# Altium PCB main.PcbDoc (part 3 of 3)
Units mm, origin at the board's own origin, x right, y up, seen from the top; angles counter-clockwise.
Board outline 126 x 86 mm, 2 copper layers (Top Layer, Bottom Layer); 214 components, 256 nets, 850 pads, 614 vias.
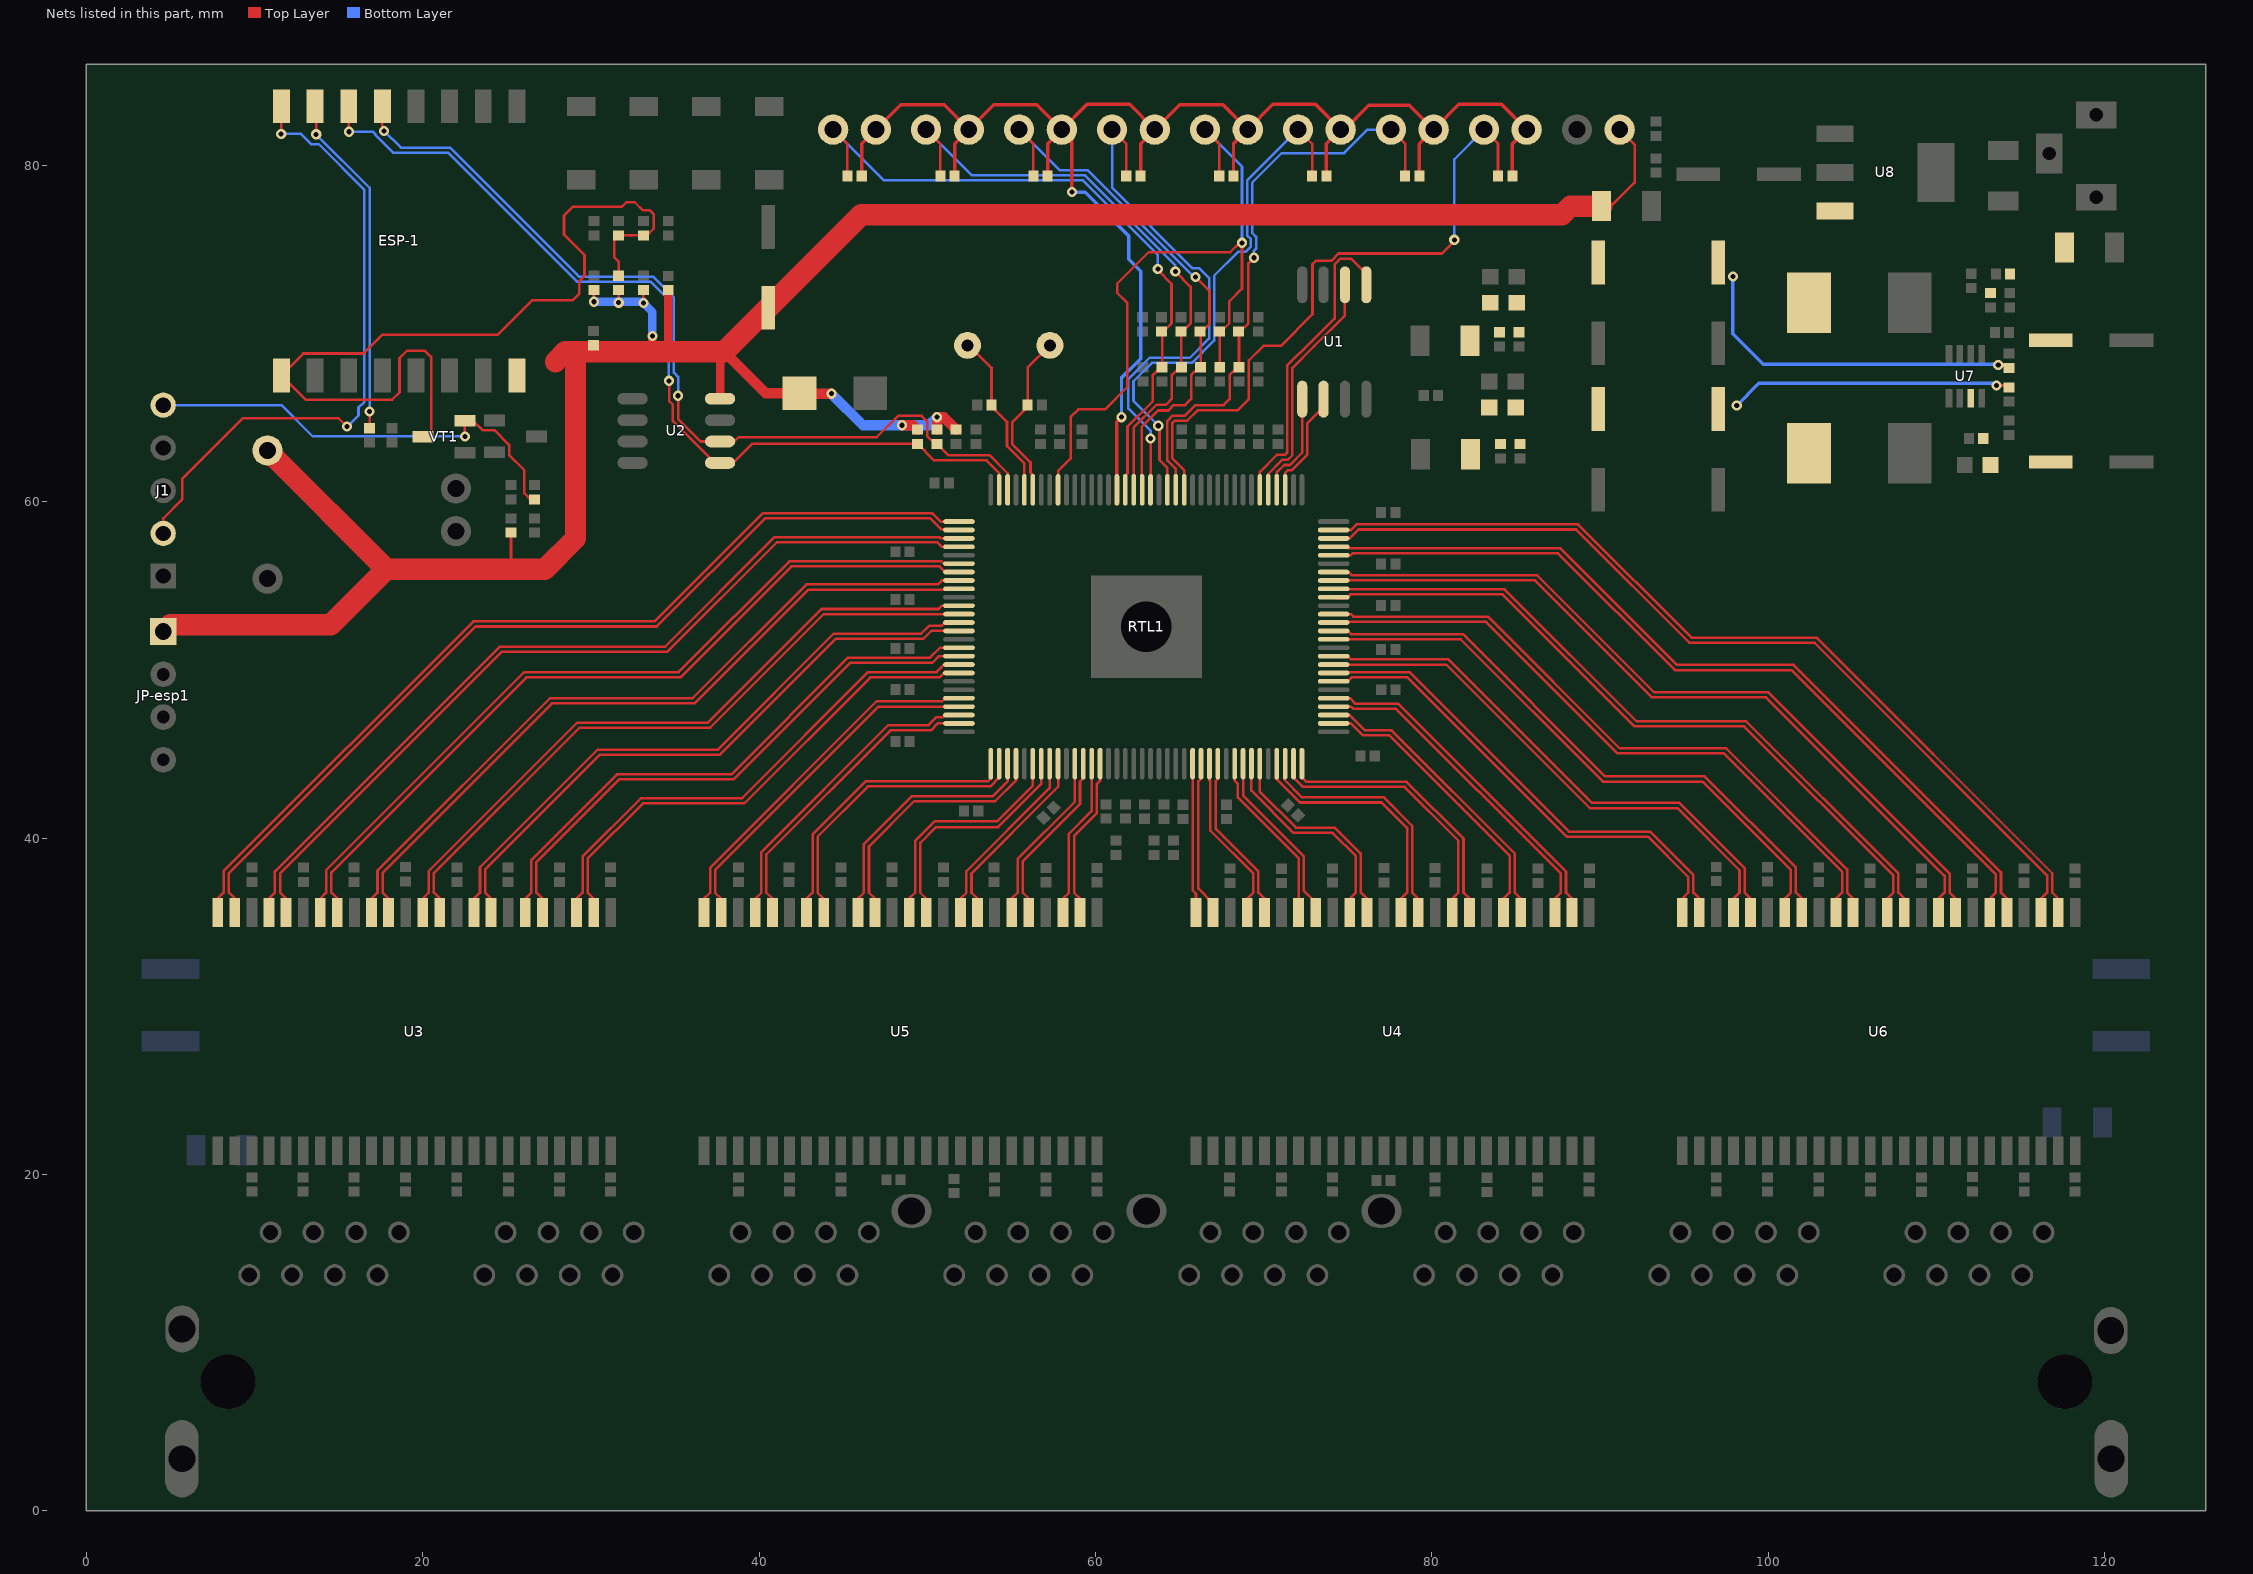
[diagram p3: the nets of this part, all layers, seen from the top]

## Via types
v1: diameter 0.61, hole 0.305, Top Layer to Bottom Layer, 609 vias
v2: diameter 0.711, hole 0.305, Top Layer to Bottom Layer, 5 vias

## Nets (pads, with @x,y where several pads share a name; then routed paths per layer and width w, separated by ;. In a path a pad name is that pad's centre, name@x,y a point inside that pad or via, vN(x,y) a via of type N, cw(c..) or ccw(c..) an arc to the next point about the centre after c; other vN are vias at no path point) (continued)
NRST: C6.1 ESP-1.1 R31.2 R40.2 VT1.3 | length 53.8
  Top Layer w0.152: VT1.3@20.01,63.856 20.295,63.856 20.498,64.059 20.498,68.605 20.142,68.961 19.05,68.961 18.618,68.529 18.618,66.497 18.186,66.065 13.035,66.065 ESP-1.1@11.6,67.5 12.909,68.809 16.478,68.809 17.595,69.926 24.463,69.926 26.521,71.984 28.931,71.984 29.317,72.37 29.317,73.129 29.616,73.428 29.616,74.659 28.397,75.878 28.397,77.012 28.906,77.521 31.826,77.521 32.106,77.8 32.606,77.8 33.089,77.318 33.503,77.318 33.731,77.089 33.731,76.225 33.332,75.826 C6.1@33.122,75.826 32.385,75.826 ; R31.2@31.648,73.431 31.648,74.27 31.394,74.524 31.394,75.572 R40.2@31.648,75.826 32.112,75.826 32.385,75.826 ; 32.385,75.819 32.385,75.826
P0A_N: RTL1.104 U3.23 | length 54.9
  Top Layer w0.152: U3.23@8.826,35.47 U3.23@8.826,35.576 8.826,36.396 8.471,36.752 8.471,37.909 23.139,52.578 33.909,52.578 40.335,59.004 50.175,59.004 50.809,58.37 RTL1.104@51.756,58.37
P0A_P: RTL1.103 U3.24 | length 55.4
  Top Layer w0.152: U3.24@7.81,35.47 U3.24@7.81,35.576 7.81,36.396 8.166,36.752 8.166,38.035 23.013,52.883 33.783,52.883 40.209,59.309 50.301,59.309 50.795,58.815 RTL1.103@51.88,58.815
P0B_N: RTL1.106 U3.20 | length 51.2
  Top Layer w0.152: U3.20@11.874,35.47 U3.20@11.874,35.576 11.874,36.396 11.519,36.752 11.519,37.884 24.714,51.079 34.544,51.079 41.046,57.582 50.597,57.582 50.864,57.315 RTL1.106@51.88,57.315
P0B_P: RTL1.105 U3.21 | length 51.6
  Top Layer w0.152: U3.21@10.858,35.47 U3.21@10.858,35.576 10.858,36.396 11.214,36.752 11.214,38.01 24.588,51.384 34.418,51.384 40.92,57.887 50.724,57.887 50.795,57.815 RTL1.105@51.88,57.815
P0C_N: RTL1.109 U3.17 | length 47.6
  Top Layer w0.152: U3.17@14.922,35.47 U3.17@14.922,35.576 14.922,36.396 14.567,36.752 14.567,37.96 26.162,49.555 35.331,49.555 41.925,56.149 50.726,56.149 50.928,55.947 50.929,55.947 51.06,55.815 RTL1.109@51.88,55.815
P0C_P: RTL1.108 U3.18 | length 48
  Top Layer w0.152: U3.18@13.906,35.47 U3.18@13.906,35.576 13.906,36.396 14.262,36.752 14.262,38.086 26.036,49.86 35.205,49.86 41.798,56.453 50.853,56.453 50.991,56.315 RTL1.108@51.88,56.315
P0D_N: RTL1.111 U3.14 | length 43.9
  Top Layer w0.152: U3.14@17.97,35.47 U3.14@17.97,35.576 17.97,36.396 17.615,36.752 17.615,37.935 27.686,48.006 36.17,48.006 42.937,54.774 51.839,54.774 RTL1.111@51.88,54.815
P0D_P: RTL1.110 U3.15 | length 44.5
  Top Layer w0.152: U3.15@16.954,35.47 U3.15@16.954,35.576 16.954,36.396 17.31,36.752 17.31,38.061 27.56,48.311 36.043,48.311 42.811,55.078 50.627,55.078 50.864,55.315 RTL1.110@51.88,55.315
P1A_N: RTL1.114 U3.11 | length 40.2
  Top Layer w0.152: U3.11@21.018,35.47 U3.11@21.018,35.576 21.018,36.396 20.663,36.752 20.663,37.909 29.312,46.558 37.084,46.558 43.841,53.315 RTL1.114@51.88,53.315
P1A_P: RTL1.113 U3.12 | length 40.8
  Top Layer w0.152: U3.12@20.002,35.47 U3.12@20.002,35.576 20.002,36.396 20.358,36.752 20.358,38.035 29.185,46.863 36.958,46.863 43.715,53.62 50.669,53.62 50.864,53.815 RTL1.113@51.88,53.815
P1B_N: RTL1.116 U3.8 | length 36.9
  Top Layer w0.152: U3.8@24.066,35.47 U3.8@24.066,35.576 24.066,36.396 23.711,36.752 23.711,38.138 30.531,44.958 37.668,44.958 44.552,51.841 49.758,51.841 50.232,52.315 RTL1.116@51.88,52.315
P1B_P: RTL1.115 U3.9 | length 37.4
  Top Layer w0.152: U3.9@23.05,35.47 U3.9@23.05,35.576 23.05,36.396 23.406,36.752 23.406,38.264 30.405,45.263 37.542,45.263 44.425,52.146 49.632,52.146 50.105,52.62 50.842,52.62 51.037,52.815 RTL1.115@51.88,52.815
P1C_N: RTL1.119 U3.5 | length 33.4
  Top Layer w0.152: U3.5@27.114,35.47 U3.5@27.114,35.576 27.114,36.396 26.759,36.752 26.759,38.57 31.674,43.485 38.481,43.485 45.415,50.419 50.291,50.419 50.687,50.815 RTL1.119@51.88,50.815
P1C_P: RTL1.118 U3.6 | length 34
  Top Layer w0.152: U3.6@26.098,35.47 U3.6@26.098,35.576 26.098,36.396 26.454,36.752 26.454,38.696 31.548,43.79 38.355,43.79 45.289,50.724 50.165,50.724 50.756,51.315 RTL1.118@51.88,51.315
P1D_N: RTL1.121 U3.2 | length 30.1
  Top Layer w0.152: U3.2@30.162,35.47 U3.2@30.162,35.576 30.162,36.396 29.807,36.752 29.807,38.773 33.096,42.062 39.116,42.062 46.609,49.555 50.724,49.555 50.984,49.815 RTL1.121@51.88,49.815
P1D_P: RTL1.120 U3.3 | length 30.7
  Top Layer w0.152: U3.3@29.146,35.47 U3.3@29.146,35.576 29.146,36.396 29.502,36.752 29.502,38.899 32.97,42.367 38.99,42.367 46.483,49.86 50.546,49.86 51.001,50.315 RTL1.120@51.88,50.315
P2A_N: RTL1.125 U5.23 | length 21.3
  Top Layer w0.152: U5.23@37.742,35.468 U5.23@37.742,35.576 37.742,36.394 37.387,36.749 37.387,38.098 47.104,47.815 RTL1.125@51.88,47.815
P2A_P: RTL1.124 U5.24 | length 21.9
  Top Layer w0.152: U5.24@36.726,35.468 U5.24@36.726,35.576 36.726,36.394 37.082,36.749 37.082,38.224 46.991,48.133 50.877,48.133 51.059,48.315 RTL1.124@51.88,48.315
P2B_N: RTL1.127 U5.20 | length 18.4
  Top Layer w0.152: U5.20@40.79,35.468 U5.20@40.79,35.576 40.79,36.394 40.435,36.749 40.435,39.038 47.803,46.406 50.207,46.406 50.616,46.815 RTL1.127@51.88,46.815
P2B_P: RTL1.126 U5.21 | length 19
  Top Layer w0.152: U5.21@39.774,35.468 U5.21@39.774,35.576 39.774,36.394 40.13,36.749 40.13,39.164 47.677,46.711 50.081,46.711 50.554,47.184 50.929,47.184 51.06,47.315 RTL1.126@51.88,47.315
P2C_N: RTL1.2 U5.17 | length 17.8
  Top Layer w0.152: U5.17@43.838,35.468 U5.17@43.838,35.576 43.838,36.394 43.485,36.747 43.485,40.09 46.473,43.078 53.746,43.078 54.27,43.602 RTL1.2@54.27,44.425
P2C_P: RTL1.1 U5.18 | length 17.8
  Top Layer w0.152: U5.18@42.822,35.468 U5.18@42.822,35.576 42.822,36.394 43.18,36.752 43.18,40.216 46.347,43.383 53.62,43.383 53.77,43.533 RTL1.1@53.77,44.425
P2D_N: RTL1.4 U5.14 | length 15.5
  Top Layer w0.152: U5.14@46.886,35.468 U5.14@46.886,35.576 46.886,36.394 46.531,36.749 46.531,39.511 49.209,42.189 54.025,42.189 55.27,43.435 RTL1.4@55.27,44.425
P2D_P: RTL1.3 U5.15 | length 15.5
  Top Layer w0.152: U5.15@45.87,35.468 U5.15@45.87,35.576 45.87,36.394 46.226,36.749 46.226,39.637 49.083,42.494 53.899,42.494 54.77,43.366 RTL1.3@54.77,44.425
P3A_N: RTL1.7 U5.11 | length 14.2
  Top Layer w0.152: U5.11@49.934,35.468 U5.11@49.934,35.576 49.934,36.394 49.579,36.749 49.579,39.709 50.519,40.649 54.213,40.649 56.77,43.207 RTL1.7@56.77,44.425
P3A_P: RTL1.6 U5.12 | length 14.2
  Top Layer w0.152: U5.12@48.918,35.468 U5.12@48.918,35.576 48.918,36.394 49.274,36.749 49.274,39.835 50.435,40.996 54.128,40.996 56.27,43.138 RTL1.6@56.27,44.425
P3B_N: RTL1.9 U5.8 | length 11.2
  Top Layer w0.152: U5.8@52.982,35.468 U5.8@52.982,35.576 52.982,36.394 52.627,36.749 52.627,37.901 57.575,42.849 57.575,42.855 57.77,43.05 RTL1.9@57.77,44.425
P3B_P: RTL1.8 U5.9 | length 11.2
  Top Layer w0.152: U5.9@51.966,35.468 U5.9@51.966,35.576 51.966,36.394 52.322,36.749 52.322,38.027 57.27,42.975 RTL1.8@57.27,44.425
P3C_N: RTL1.12 U5.5 | length 10.6
  Top Layer w0.152: U5.5@56.03,35.468 U5.5@56.03,35.576 56.03,36.394 55.675,36.749 55.675,38.631 57.912,40.869 ; 57.912,40.869 59.075,42.032 59.075,43.352 59.27,43.548 RTL1.12@59.27,44.425
P3C_P: RTL1.11 U5.6 | length 10.5
  Top Layer w0.152: U5.6@55.014,35.468 U5.6@55.014,35.576 55.014,36.394 55.37,36.749 55.37,38.758 58.77,42.159 RTL1.11@58.77,44.425
P3D_N: RTL1.14 U5.2 | length 9.7
  Top Layer w0.152: U5.2@59.078,35.468 U5.2@59.078,35.576 59.078,36.394 58.723,36.749 58.723,40.13 60.075,41.482 60.075,43.214 60.27,43.409 RTL1.14@60.27,44.425
P3D_P: RTL1.13 U5.3 | length 9.7
  Top Layer w0.152: U5.3@58.062,35.468 U5.3@58.062,35.576 58.062,36.394 58.418,36.749 58.418,40.256 59.77,41.608 RTL1.13@59.77,44.425
P4A_N: RTL1.26 U4.23 | length 8.6
  Top Layer w0.152: RTL1.26@66.27,44.425 66.27,44.405 RTL1.26@66.285,44.39 ; RTL1.26@66.31,43.565 66.11,43.365 66.11,36.996 66.99,36.116 U4.23@66.99,35.576 U4.23@66.99,35.47
P4A_P: RTL1.25 U4.24 | length 9
  Top Layer w0.152: RTL1.25@65.77,44.425 65.77,36.897 65.974,36.693 U4.24@65.974,35.576 U4.24@65.974,35.47
P4B_N: RTL1.28 U4.20 | length 10.2
  Top Layer w0.152: RTL1.28@67.27,44.425 67.27,43.521 67.135,43.386 67.135,40.56 69.683,38.013 69.683,36.752 70.038,36.396 U4.20@70.038,35.576 U4.20@70.038,35.47
P4B_P: RTL1.27 U4.21 | length 10.2
  Top Layer w0.152: RTL1.27@66.77,44.425 66.77,43.44 66.83,43.38 66.83,40.434 69.378,37.886 69.378,36.752 69.022,36.396 U4.21@69.022,35.576 U4.21@69.022,35.47
P4C_N: RTL1.31 U4.17 | length 10.7
  Top Layer w0.152: RTL1.31@68.77,44.425 68.77,42.532 72.375,38.927 72.375,36.896 73.086,36.185 U4.17@73.086,35.576 U4.17@73.086,35.47
P4C_P: RTL1.30 U4.18 | length 10.5
  Top Layer w0.152: RTL1.30@68.27,44.425 68.27,43.409 68.465,43.214 68.465,42.406 72.07,38.801 U4.18@72.07,35.576 U4.18@72.07,35.47
P4D_N: RTL1.33 U4.14 | length 12.9
  Top Layer w0.152: RTL1.33@69.77,44.425 69.77,42.751 71.907,40.615 74.218,40.615 75.779,39.054 75.779,36.752 76.134,36.396 U4.14@76.134,35.576 U4.14@76.134,35.47
P4D_P: RTL1.32 U4.15 | length 13
  Top Layer w0.152: RTL1.32@69.27,44.425 69.27,42.82 71.78,40.31 74.092,40.31 75.474,38.928 75.474,36.752 75.118,36.396 U4.15@75.118,35.576 U4.15@75.118,35.47
P5A_N: RTL1.36 U4.11 | length 15.1
  Top Layer w0.152: RTL1.36@71.27,44.425 71.27,43.875 71.21,43.815 71.21,43.496 72.286,42.42 77.138,42.42 78.827,40.731 78.827,36.752 79.182,36.396 U4.11@79.182,35.576 U4.11@79.182,35.47
P5A_P: RTL1.35 U4.12 | length 15.2
  Top Layer w0.152: RTL1.35@70.77,44.425 70.77,43.505 72.16,42.115 77.012,42.115 78.522,40.605 78.522,36.752 78.166,36.396 U4.12@78.166,35.576 U4.12@78.166,35.47
P5B_N: RTL1.38 U4.8 | length 16.6
  Top Layer w0.152: RTL1.38@72.27,44.425 72.27,43.63 72.555,43.345 78.496,43.345 81.875,39.966 81.875,36.752 82.23,36.396 U4.8@82.23,35.576 U4.8@82.23,35.47
P5B_P: RTL1.37 U4.9 | length 16.7
  Top Layer w0.152: RTL1.37@71.77,44.425 71.77,43.605 71.902,43.474 71.902,43.473 72.118,43.257 72.119,43.257 72.335,43.04 78.37,43.04 81.57,39.84 81.57,36.752 81.214,36.396 U4.9@81.214,35.576 U4.9@81.214,35.47
P5C_N: RTL1.41 U4.5 | length 17.9
  Top Layer w0.152: RTL1.41@74.16,47.315 75.107,47.315 76.017,46.406 77.596,46.406 84.923,39.079 84.923,36.752 85.278,36.396 U4.5@85.278,35.576 U4.5@85.278,35.47
P5C_P: RTL1.40 U4.6 | length 17.3
  Top Layer w0.152: RTL1.40@74.16,46.815 75.176,46.815 75.891,46.101 77.47,46.101 84.618,38.953 84.618,36.752 84.262,36.396 U4.6@84.262,35.576 U4.6@84.262,35.47
P5D_N: RTL1.43 U4.2 | length 20.8
  Top Layer w0.152: RTL1.43@74.16,48.315 75.128,48.315 75.463,47.981 78.003,47.981 87.971,38.013 87.971,36.752 88.326,36.396 U4.2@88.326,35.576 U4.2@88.326,35.47
P5D_P: RTL1.42 U4.3 | length 20.2
  Top Layer w0.152: RTL1.42@74.16,47.815 75.197,47.815 75.336,47.676 77.876,47.676 87.666,37.886 87.666,36.752 87.31,36.396 U4.3@87.31,35.576 U4.3@87.31,35.47
P6A_N: RTL1.46 U6.23 | length 28.9
  Top Layer w0.152: RTL1.46@74.16,49.815 74.229,49.815 74.274,49.86 78.663,49.86 88.137,40.386 92.963,40.386 95.544,37.806 95.544,36.752 95.899,36.396 U6.23@95.899,35.47
P6A_P: RTL1.45 U6.24 | length 28.5
  Top Layer w0.152: RTL1.45@74.16,49.315 74.981,49.315 75.222,49.555 78.537,49.555 88.011,40.081 92.837,40.081 95.239,37.679 95.239,36.752 94.883,36.396 U6.24@94.883,35.47
P6B_N: RTL1.48 U6.20 | length 32.5
  Top Layer w0.152: RTL1.48@74.16,50.815 74.985,50.815 75.18,50.62 80.977,50.62 89.509,42.088 94.716,42.088 98.592,38.212 98.592,36.752 98.947,36.396 U6.20@98.947,35.47
P6B_P: RTL1.47 U6.21 | length 32
  Top Layer w0.152: RTL1.47@74.16,50.315 80.85,50.315 89.383,41.783 94.59,41.783 98.287,38.086 98.287,36.752 97.931,36.396 U6.21@97.931,35.47
P6C_N: RTL1.51 U6.17 | length 36.2
  Top Layer w0.152: RTL1.51@74.16,52.315 74.981,52.315 75.176,52.121 81.051,52.121 ; 81.052,52.12 81.839,52.12 90.296,43.663 96.214,43.663 101.64,38.237 101.64,36.752 101.995,36.396 U6.17@101.995,35.47
P6C_P: RTL1.50 U6.18 | length 35.6
  Top Layer w0.152: RTL1.50@74.16,51.815 81.713,51.815 90.17,43.358 96.088,43.358 101.335,38.111 101.335,36.752 100.979,36.396 U6.18@100.979,35.47
P6D_N: RTL1.53 U6.14 | length 39.6
  Top Layer w0.152: RTL1.53@74.16,53.315 75.176,53.315 75.329,53.162 83.337,53.162 91.16,45.339 97.484,45.339 104.688,38.136 104.688,36.752 105.043,36.396 U6.14@105.043,35.47
P6D_P: RTL1.52 U6.15 | length 39.1
  Top Layer w0.152: RTL1.52@74.16,52.815 74.194,52.849 83.219,52.849 91.034,45.034 97.358,45.034 104.383,38.01 104.383,36.752 104.027,36.396 U6.15@104.027,35.47
P7A_N: RTL1.56 U6.11 | length 43.2
  Top Layer w0.152: RTL1.56@74.16,54.815 74.188,54.788 84.327,54.788 92.176,46.939 98.687,46.939 107.736,37.89 107.736,36.752 108.091,36.396 U6.11@108.091,35.47
P7A_P: RTL1.55 U6.12 | length 42.8
  Top Layer w0.152: RTL1.55@74.16,54.315 74.229,54.315 74.284,54.26 74.927,54.26 75.149,54.483 84.201,54.483 92.05,46.634 98.56,46.634 107.431,37.764 107.431,36.752 107.075,36.396 U6.12@107.075,35.47
P7B_N: RTL1.58 U6.8 | length 46.6
  Top Layer w0.152: RTL1.58@74.16,55.815 75.035,55.815 75.224,55.626 86.258,55.626 ; 86.258,55.625 93.217,48.666 99.999,48.666 110.784,37.882 110.784,36.752 111.139,36.396 U6.8@111.139,35.47
P7B_P: RTL1.57 U6.9 | length 46
  Top Layer w0.152: RTL1.57@74.16,55.315 86.137,55.315 93.091,48.362 99.873,48.362 110.479,37.756 110.479,36.752 110.123,36.396 U6.9@110.123,35.47
P7C_N: RTL1.61 U6.5 | length 50.4
  Top Layer w0.152: RTL1.61@74.16,57.315 75.01,57.315 75.01,57.232 87.624,57.232 94.563,50.292 101.498,50.292 113.832,37.959 113.832,36.752 114.187,36.396 U6.5@114.187,35.47
P7C_P: RTL1.60 U6.6 | length 49.8
  Top Layer w0.152: RTL1.60@74.16,56.815 75.176,56.815 75.288,56.927 87.497,56.927 94.437,49.987 101.372,49.987 113.527,37.833 113.527,36.752 113.171,36.396 U6.6@113.171,35.47
P7D_N: RTL1.63 U6.2 | length 54
  Top Layer w0.152: RTL1.63@74.16,58.315 75.176,58.315 75.51,58.649 88.696,58.649 95.427,51.918 102.869,51.918 116.88,37.907 116.88,36.752 117.235,36.396 U6.2@117.235,35.47
P7D_P: RTL1.62 U6.3 | length 53.6
  Top Layer w0.152: RTL1.62@74.16,57.815 75.11,57.815 75.639,58.344 88.57,58.344 95.301,51.613 102.743,51.613 116.575,37.781 116.575,36.752 116.219,36.396 U6.3@116.219,35.47
RTS: J1.5 R43.2 VT1.2 | length 26.9
  Top Layer w0.152: v1(22.51,63.881) VT1.2@22.51,64.806 23.002,64.806 23.555,64.252 24.254,64.252 25.131,63.376 25.131,62.779 26.035,61.874 26.035,60.503 26.409,60.129 R43.2@26.645,60.129
  Bottom Layer w0.152: J1.5@4.572,65.735 11.608,65.735 13.462,63.881 v1(22.51,63.881)
RXD: ESP-1.15 R41.2 | length 20.6
  Top Layer w0.152: ESP-1.15@13.6,83.5 13.843,83.257 13.665,83.079 v1(13.665,81.839) ; R41.2@16.84,64.364 v1(16.84,65.354)
  Bottom Layer w0.152: v1(13.665,81.839) 16.84,78.664 v1(16.84,65.354)
SCK/MDC: ESP-1.13 R29.1 RTL1.100 U2.6 | length 53.9
  Top Layer w0.152: ESP-1.13@17.6,83.5 17.6,82.146 v1(17.704,82.042) ; v1(35.179,66.294) 35.179,64.922 36.525,63.576 U2.6@37.677,63.576 37.776,63.576 37.928,63.424 38.379,63.424 38.786,63.83 46.99,63.83 48.26,65.1 49.657,65.1 49.987,64.77 49.987,63.917 50.473,63.431 R29.1@50.571,63.431 51.239,62.763 53.696,62.763 54.77,61.69 RTL1.100@54.77,60.705
  Bottom Layer w0.152: v1(17.704,82.042) 18.694,81.051 21.615,81.051 29.285,73.381 33.68,73.381 34.925,72.135 34.925,67.666 35.179,67.412 v1(35.179,66.294)
SDA/MDIO: ESP-1.14 R30.1 RTL1.101 U2.5 | length 54.6
  Top Layer w0.152: ESP-1.14@15.6,83.5 15.6,82.012 v1(15.621,81.991) ; v1(34.646,67.183) 34.646,65.989 34.874,65.761 34.874,64.796 34.925,64.745 ; 34.925,64.745 37.363,62.306 U2.5@37.677,62.306 38.456,62.306 39.58,63.431 R30.1@49.403,63.431 ; R30.1@49.403,63.449 50.394,62.459 53.518,62.459 54.27,61.706 RTL1.101@54.27,60.705
  Bottom Layer w0.152: v1(15.621,81.991) 17.043,81.991 17.17,81.864 17.17,81.821 18.245,80.747 21.488,80.747 29.159,73.076 33.553,73.076 34.62,72.009 34.62,67.208 v1(34.646,67.183)
SLED_G1B: D1.K D2.K D3.K D4.K D5.K D6.K D7.K D8.K R3.2 R4.2 R5.2 R6.2 R7.2 R8.2 R9.2 R10.2 RTL1.87 | length 96.9
  Top Layer w0.203: R3.2@46.101,79.35 46.101,81.28 D1.K@46.939,82.118 48.412,83.591 50.994,83.591 D2.K@52.467,82.118 ; R4.2@51.626,79.35 51.626,81.278 D2.K@52.467,82.118 ; R5.2@57.152,79.35 57.152,81.275 D3.K@57.995,82.118 ; v1(58.598,78.41) 58.598,81.515 D3.K@57.995,82.118 ; RTL1.87@61.27,60.705 61.27,64.75 v1(61.544,65.024) ; R6.2@62.677,79.35 62.677,81.273 D4.K@63.522,82.118 ; R7.2@68.202,79.35 68.202,81.271 D5.K@69.05,82.118 ; R8.2@73.728,79.35 73.728,81.268 D6.K@74.578,82.118 ; R9.2@79.253,79.35 79.253,81.266 D7.K@80.105,82.118 ; R10.2@84.778,79.35 84.778,81.264 D8.K@85.633,82.118 84.134,83.617 81.604,83.617 D7.K@80.105,82.118 ; D2.K@52.467,82.118 53.946,83.598 56.515,83.598 D3.K@57.995,82.118 ; D3.K@57.995,82.118 59.493,83.617 62.024,83.617 D4.K@63.522,82.118 ; D4.K@63.522,82.118 64.995,83.591 67.577,83.591 D5.K@69.05,82.118 ; D5.K@69.05,82.118 70.549,83.617 73.079,83.617 D6.K@74.578,82.118 ; D6.K@74.578,82.118 74.803,82.118 76.251,83.566 78.664,83.566 79.578,82.652 79.578,82.118 D7.K@80.105,82.118
  Bottom Layer w0.203: v1@58.598,78.384 59.385,78.384 61.976,75.794 61.976,74.406 62.687,73.695 62.687,68.502 61.544,67.359 v1(61.544,65.024)
SLED_P0: D1.A R3.1 R16.2 R22.1 RTL1.86 | length 41.1
  Top Layer w0.152: D1.A@44.399,82.118 45.251,81.266 R3.1@45.251,79.35 ; RTL1.86@61.77,60.705 61.77,61.57 61.902,61.701 61.902,64.467 63.404,65.969 63.404,67.534 63.859,67.989 R16.2@63.957,67.989 63.957,70.085 R22.1@63.932,70.111 64.03,70.111 64.516,70.597 64.516,72.949 63.703,73.762 v1(63.703,73.838)
  Bottom Layer w0.152: D1.A@44.399,82.118 47.422,79.096 59.259,79.096 63.703,74.651 v1(63.703,73.838)
SLED_P1: D2.A R1.2@65.1,67.989 R4.1 R11.1 RTL1.85 | length 36.9
  Top Layer w0.152: D2.A@49.927,82.118 50.776,81.269 R4.1@50.776,79.35 ; RTL1.85@62.27,60.705 62.27,64.404 63.627,65.761 64.178,65.761 64.541,66.124 64.541,67.528 65.002,67.989 R1.2@65.1,67.989 65.1,70.085 R11.1@65.075,70.111 65.173,70.111 65.659,70.597 65.659,72.771 v1(64.745,73.685)
  Bottom Layer w0.152: D2.A@49.927,82.118 52.645,79.4 59.385,79.4 64.745,74.041 v1(64.745,73.685)
SLED_P2: D3.A R5.1 R19.2 R25.1 RTL1.84 | length 32.8
  Top Layer w0.152: D3.A@55.455,82.118 56.302,81.271 R5.1@56.302,79.35 ; RTL1.84@62.77,60.705 62.737,60.739 62.737,64.439 63.716,65.419 64.327,65.419 64.643,65.735 65.321,65.735 65.684,66.098 65.684,67.528 66.145,67.989 R19.2@66.243,67.989 66.243,70.085 R25.1@66.218,70.111 66.316,70.111 66.777,70.571 66.777,72.517 v1(65.938,73.355)
  Bottom Layer w0.152: D3.A@55.455,82.118 57.868,79.705 59.511,79.705 65.861,73.355 v1(65.938,73.355)
SLED_P3: D4.A R6.1 RTL1.83 | length 31.1
  Top Layer w0.152: D4.A@60.982,82.118 61.827,81.273 R6.1@61.827,79.35 ; RTL1.83@63.27,60.705 v1(63.27,63.754)
  Bottom Layer w0.152: D4.A@60.982,82.118 60.982,78.665 65.747,73.9 65.749,73.9 65.759,73.891 65.765,73.891 65.768,73.889 66.159,73.889 66.751,73.297 66.751,69.698 65.608,68.555 63.221,68.555 61.951,67.284 61.951,65.54 63.27,64.22 v1(63.27,63.754)
SLED_P4: D5.A R7.1 R18.2 R24.1 RTL1.94 | length 42.4
  Top Layer w0.152: RTL1.94@57.77,60.705 57.77,61.813 58.522,62.564 58.522,65.024 58.979,65.481 60.554,65.481 61.874,66.802 61.874,71.831 61.29,72.415 61.29,72.967 63.152,74.828 67.996,74.828 68.555,75.387 v1(68.707,75.387) 68.707,72.669 67.95,71.913 67.95,70.602 67.459,70.111 R24.1@67.361,70.111 67.386,70.085 R18.2@67.386,67.989 R18.2@67.288,67.989 ; D5.A@66.51,82.118 67.352,81.276 R7.1@67.352,79.35
  Bottom Layer w0.152: D5.A@66.51,82.118 68.707,79.921 v1(68.707,75.387)
SLED_P5: D6.A R8.1 RTL1.81 | length 31.3
  Top Layer w0.152: v1(63.729,64.516) 63.804,64.441 63.804,62.478 64.27,62.012 RTL1.81@64.27,60.705 ; D6.A@72.038,82.118 72.878,81.278 R8.1@72.878,79.35
  Bottom Layer w0.152: v1(63.729,64.516) 62.255,65.989 62.255,67.158 63.348,68.25 65.734,68.25 67.056,69.571 67.056,73.431 68.478,74.854 68.928,74.854 69.24,75.166 69.24,75.608 69.012,75.837 69.012,79.092 D6.A@72.038,82.118
SLED_P6: D7.A R2.2@68.529,67.989 R9.1 R12.1 RTL1.80 | length 35
  Top Layer w0.152: RTL1.80@64.77,60.705 64.77,61.943 64.267,62.446 64.267,64.802 64.58,65.114 65.316,65.114 65.938,65.735 67.607,65.735 67.97,66.098 67.97,67.528 68.431,67.989 R2.2@68.529,67.989 68.529,70.085 R12.1@68.504,70.111 68.602,70.111 69.088,70.597 69.088,74.168 v1(69.418,74.498) ; D7.A@77.565,82.118 78.403,81.28 R9.1@78.403,79.35
  Bottom Layer w0.152: v1(69.418,74.498) 69.418,74.913 69.545,75.04 69.545,75.734 69.317,75.963 69.317,78.966 71.072,80.721 74.777,80.721 76.174,82.118 D7.A@77.565,82.118
SLED_P7: D8.A R10.1 RTL1.79 | length 39.1
  Top Layer w0.152: RTL1.79@65.27,60.705 65.27,61.874 64.572,62.572 64.572,64.675 64.706,64.809 65.443,64.809 66.064,65.43 68.453,65.43 69.119,66.096 69.119,68.407 69.977,69.266 71.018,69.266 72.898,71.145 72.898,74.117 73.101,74.32 74.016,74.32 74.448,74.752 80.594,74.752 81.331,75.489 v1(81.331,75.565) ; D8.A@83.093,82.118 83.928,81.283 R10.1@83.928,79.35
  Bottom Layer w0.152: v1(81.331,75.565) 81.331,80.356 D8.A@83.093,82.118
SPI_CLK: RTL1.67 U1.6 | length 6.5
  Top Layer w0.152: RTL1.67@71.27,60.705 71.27,61.694 71.45,61.874 71.677,61.874 72.593,62.79 72.593,64.668 73.558,65.634 U1.6@73.558,66.094
SPI_CS: RTL1.70 U1.1 | length 18.6
  Top Layer w0.152: RTL1.70@69.77,60.705 69.77,61.769 70.789,62.788 71.272,62.788 71.394,62.911 71.394,68.084 72.856,69.545 72.873,69.545 74.219,70.891 74.219,74.092 74.574,74.447 75.184,74.447 75.921,73.711 75.921,73.072 U1.1@76.098,72.894 U1.1@76.069,72.894
SPI_D0: RTL1.68 U1.5 | length 6.2
  Top Layer w0.152: RTL1.68@70.77,60.705 70.77,61.729 71.22,62.179 71.55,62.179 72.288,62.917 U1.5@72.288,66.094
SPI_D1: RTL1.69 U1.2 | length 14.3
  Top Layer w0.152: RTL1.69@70.27,60.705 70.27,61.66 71.094,62.483 71.424,62.483 71.699,62.758 71.699,67.958 72.982,69.24 73,69.24 74.828,71.069 U1.2@74.828,72.894
TXD: ESP-1.16 J1.2 | length 37.7
  Top Layer w0.152: J1.2@4.572,58.115 4.572,59.004 5.715,60.147 5.715,61.367 9.296,64.948 15.008,64.948 v1(15.494,64.462) ; v1(11.582,81.864) 11.582,83.482 ESP-1.16@11.6,83.5
  Bottom Layer w0.152: v1(11.582,81.864) 12.751,81.864 13.36,81.255 13.818,81.255 16.535,78.538 16.535,65.938 16.192,65.596 16.18,65.608 16.18,65.122 15.494,64.436 v1(15.494,64.462)
V5: C46.2 C47.2 C48.2 C94.2 L1.1 R76.2 R77.2 U7.7 U8.3
V10: C55.2 C56.2 C58.2 C59.2 C60.2 C61.2 L5.2 L8.2 R79.2 | length 20.7
  Top Layer w0.203: v1(113.665,68.123) 114.129,68.123 R79.2@114.3,67.952
  Bottom Layer w0.203: v1(97.892,73.381) 97.892,69.977 99.695,68.174 113.614,68.174 v1(113.665,68.123)
V33A: C53.2 C54.2 C57.2 C62.2 C63.2 C73.2 L6.2 L7.1 R80.2 | length 17
  Top Layer w0.203: v1(113.563,66.904) 114.408,66.904 R80.2@114.3,66.795
  Bottom Layer w0.203: v1(98.12,65.71) 99.441,67.031 113.436,67.031 v1(113.563,66.904)
V33B: C4.2 C5.1 D9.A D10.2 ESP-1.8 JP-esp1.1 L9.1 LS1.2 R15.1 R29.2 R30.2 R31.1 R33.1 R34.2 R35.2 R37.2 U2.8 | length 155.2
  Top Layer w0.152: R37.2@25.248,58.154 25.248,56.159 25.425,55.982 ; v1(30.175,71.882) R33.1@30.175,72.581 ; v1(31.648,71.831) R31.1@31.648,72.581 ; v1(33.122,71.806) R35.2@33.122,72.581 ; L9.1@90.086,77.572 90.653,77.572 92.05,78.969 92.05,81.23 D9.A@91.161,82.119
  Top Layer w0.508: 33.604,68.91 33.655,68.961 v1(33.655,69.85) ; R34.2@34.588,72.581 R34.2@34.595,72.575 34.595,69.012 34.696,68.91 ; U2.8@37.677,66.116 37.677,68.666 37.922,68.91
  Top Layer w0.61: 37.922,68.91 40.385,66.446 D10.2@42.401,66.446 42.426,66.421 v1(44.298,66.421) ; v1(48.489,64.541) 49.142,64.541 R30.2@49.403,64.281 ; R29.2@50.571,64.281 v1(50.571,65.024) 50.971,65.024 R15.1@51.714,64.281
  Top Layer w1.27: JP-esp1.1@4.572,52.273 4.978,52.68 14.529,52.68 17.831,55.982 ; LS1.2@10.922,63.221 10.922,62.89 17.831,55.982 ; 27.889,68.326 28.473,68.91 29.032,68.91 ; L9.1@90.086,77.572 88.24,77.572 87.732,77.064 46.075,77.064 C5.1@40.538,71.527 37.922,68.91 34.696,68.91 33.604,68.91 29.032,68.91 ; 17.831,55.982 25.425,55.982 27.254,55.982 29.083,57.81 29.083,68.859 29.032,68.91
  Bottom Layer w0.508: v1(30.175,71.882) 33.045,71.882 v1(33.122,71.806) 33.655,71.272 v1(33.655,69.85)
  Bottom Layer w0.61: v1(44.298,66.421) 46.177,64.541 v1(48.489,64.541) 50.089,64.541 v1(50.571,65.024)
XTALI: C2.1 RTL1.98 Y1.2 | length 10
  Top Layer w0.152: Y1.2@52.389,69.291 52.476,69.291 53.816,67.952 C2.1@53.816,65.735 53.816,65.659 54.737,64.738 54.737,63.298 55.77,62.264 RTL1.98@55.77,60.705
XTALO: C1.1 RTL1.97 Y1.1 | length 10
  Top Layer w0.152: RTL1.97@56.27,60.705 56.27,61.586 56.134,61.722 56.134,62.332 55.042,63.424 55.042,64.712 55.963,65.634 C1.1@55.963,65.735 55.963,67.966 Y1.1@57.289,69.291
pads on no net: ESP-1.2 RTL1.65 RTL1.66 RTL1.74 RTL1.75 RTL1.82 RTL1.88 RTL1.89 RTL1.90 RTL1.93 RTL1.123

## Polygon pours and split planes (outlines as drawn)
GND on Bottom Layer "Copper_Bottom_Power" (solid, remove dead copper, pour order 24): 93.294,85.7 122.911,85.7 122.911,84.684 122.911,58.649 122.174,58.649 121.641,59.182 79.908,59.182 79.908,78.08 80.416,78.588 93.294,78.588
GND on Bottom Layer "Copper_Bottom_rtl-Config" (solid, remove dead copper, pour order 22): 46.533,78.511 46.279,78.257 46.279,64.16 52.4,64.16 53.137,63.424 53.137,59.385 62.357,59.385 62.611,59.131 80.239,59.131 80.239,80.213 79.883,80.569 78.76,79.446 47.401,79.446
GND on Bottom Layer "Copper_Bottom_ESP-Config" (solid, remove dead copper, pour order 18): 27.057,78.766 27.057,59.924 27.457,60.325 53.315,60.325 53.315,64.77 52.883,65.202 47.32,65.202 47.32,78.868 46.408,79.78 45.469,78.842 27.051,78.842
GND on Bottom Layer "Copper_Bottom_Key&LED" (solid, remove dead copper, pour order 16): 27.711,85.7 93.396,85.7 93.878,85.217 93.878,78.105 27.33,78.105 26.721,78.715 27.711,79.705
GND on Bottom Layer "Copper_Bottom_ESP" (solid, remove dead copper, pour order 12): 10.592,85.7 27.889,85.7 27.915,85.674 27.915,67.056 10.795,67.056 10.592,67.259
GND on Bottom Layer "Copper_Bottom_Left_IO" (solid, remove dead copper, pour order 10): 3.073,40.132 3.073,67.31 30.785,67.31 30.81,67.335 31.115,67.031 31.115,61.062 31.318,60.858 38.837,60.858 38.837,60.096 32.817,54.077 17.577,54.077 3.632,40.132
GND on Bottom Layer "Copper_Bottom_Right_Blank" (solid, remove dead copper, pour order 6): 122.911,39.243 122.911,58.649 122.225,59.334 90.703,59.334 90.703,58.064 95.834,52.934 103.607,52.934 117.297,39.243
GND on Bottom Layer "Copper_Bottom_Chip" (solid, remove dead copper, pour order 4): 52.375,45.771 72.06,45.771 73.533,47.244 73.533,60.503 52.4,60.503 52.273,60.376 52.273,45.695
GND on Bottom Layer "Copper_Bottom_Transfomer-R" (solid, remove dead copper, pour order 2): 122.911,31.623 119.253,31.623 119.253,32.842 119.228,32.817 63.17,32.817 63.17,46.117 63.382,46.33 72.085,46.33 72.822,47.066 72.796,47.092 72.796,59.334 90.703,59.334 96.647,53.391 103.759,53.391 117.196,39.954 122.199,39.954 122.911,39.243
GND on Bottom Layer "Copper_Bottom_Transfomer" (solid, remove dead copper, pour order 0): 3.073,31.623 6.706,31.623 6.706,32.817 63.17,32.817 64.338,33.985 64.338,46.33 54.762,46.33 53.137,47.955 53.137,60.858 38.837,60.858 32.436,54.458 17.399,54.458 3.073,40.132
GND on Top Layer "Copper_Top_Key&LED-Patch1" (solid, remove dead copper, pour order 40): 89.002,84.023 94.031,84.023 94.869,83.185 94.158,82.474 94.158,74.778 90.221,74.778 87.249,71.806 80.975,71.806 80.975,79.934 80.772,80.137
GND on Top Layer "Copper_Top_ESP" (solid, remove dead copper, pour order 36): 10.592,85.7 26.721,85.7 26.721,66.624 26.518,66.421 11.049,66.421 11.049,66.853 10.592,67.31
GND on Top Layer "Copper_Top_Key&LED" (solid, remove dead copper, pour order 34): 94.107,85.7 94.513,85.303 94.513,77.597 27.838,77.597 26.467,78.969 26.467,85.455 26.721,85.7
GND on Top Layer "Copper_Top_ESP_config" (solid, remove dead copper, pour order 38): 10.82,67.742 10.592,67.513 10.592,67.31 3.073,67.31 3.073,41.554 3.378,41.554 3.404,41.58 9.855,41.58 22.606,54.331 33.401,54.331 42.28,63.21 42.28,79.273 22.581,79.273 22.301,79.553 12.548,69.799 10.82,69.799
GND on Top Layer "Copper_Top_rtl_Config" (solid, remove dead copper, pour order 44): 40.056,79.045 40.488,78.613 40.488,61.036 82.982,61.036 83.515,61.57 83.515,78.537 40.996,78.537 40.03,79.502
GND on Top Layer "Copper_Top_rtl" (solid, remove dead copper, pour order 46): 49.2,62.789 46.279,59.868 46.279,45.872 52.095,40.056 72.415,40.056 79.68,47.32 79.68,61.316 74.068,61.316 72.593,62.79
GND on Top Layer "Copper_Top_Right_Net" (solid, remove dead copper, pour order 48): 122.936,33.071 119.507,33.071 119.253,32.817 62.84,32.817 62.893,32.87 62.893,49.261 69.759,49.261 70.77,50.272 70.77,60.705 121.21,60.705 122.936,58.979
GND on Top Layer "Copper_Top_Left_Net" (solid, remove dead copper, pour order 50): 62.915,32.817 62.915,48.083 60.63,50.368 53.543,50.368 53.543,62.103 53.594,62.154 53.454,62.294 40.145,62.294 32.639,54.788 14.91,54.788 3.048,42.926 3.073,42.901 3.073,33.071 6.706,33.071 6.96,32.817

## Keep-outs
Keep-Out Layer:
  the board outline again, w0.254

## Other copper
Top Layer:
  rectangle net GND: 24.846,82.246 26.354,83.627
  rectangle net GND: 76.327,44.171 77.191,45.542
  rectangle net GND: 67.462,40.575 68.372,41.453
  rectangle net GND: 64.872,40.298 65.537,41.427
  rectangle net GND: 63.957,39.091 64.16,40.361
  rectangle net GND: 61.443,40.538 63.246,41.453
  rectangle net GND: 59.933,40.601 60.503,41.011
  rectangle net GND: 60.325,40.601 60.981,41.453
  rectangle net GND: 59.538,37.922 61.925,39.294
  rectangle net GND: 62.611,38.442 65.222,39.319
  rectangle net GND: 72.034,40.848 73.304,41.882
  rectangle net GND: 58.928,49.124 66.904,56.083
  rectangle net V33B: 25.095,66.523 28.829,68.478
  rectangle net GND_M: 119.278,4.877 122.682,26.822
  rectangle net GND: 80.035,66.243 83.668,68.504
  rectangle net GND: 83.007,66.243 89.332,69.571
  rectangle net GND: 85.7,66.98 90.449,70.612
  rectangle net GND: 90.449,66.218 96.469,67.361
  rectangle net GND: 79.35,58.877 89.713,61.722
  rectangle net GND: 83.033,60.096 86.436,62.865
  rectangle net GND: 85.827,60.096 100.889,63.957
  rectangle net GND: 90.551,74.778 96.418,75.971
  rectangle net GND: 97.663,74.727 101.727,75.921
  rectangle net GND: 88.417,75.692 101.879,76.454
  rectangle net GND: 97.638,66.167 104.445,69.799
  rectangle net GND: 89.408,66.98 100.889,72.644
  rectangle net GND: 89.154,58.547 122.936,60.884
  rectangle net GND: 103.886,60.681 106.959,65.964
  rectangle net GND: 103.886,65.608 111.023,67.259
  rectangle net GND: 103.861,68.047 110.363,68.783
  rectangle net GND: 103.861,66.878 113.03,68.047
  rectangle net GND: 113.563,63.551 113.817,65.405
  rectangle net GND: 112.395,65.227 113.055,65.456
  rectangle net GND: 113.055,65.227 113.817,65.837
  rectangle net GND: 113.792,63.551 115.748,64.338
  rectangle net GND: 114.833,63.551 115.748,69.037
  rectangle net GND: 114.833,68.377 115.316,70.155
  rectangle net GND: 113.767,70.536 114.859,71.069
  rectangle net GND: 113.233,69.113 113.767,71.069
  rectangle net GND: 114.021,71.069 115.646,71.857
  rectangle net GND: 114.833,70.155 115.748,73
  rectangle net GND: 111.582,71.374 111.735,73
  rectangle net GND: 111.735,70.637 112.7,73
  rectangle net GND: 110.769,71.374 111.582,73.685
  rectangle net GND: 103.911,68.428 106.299,74.879
  rectangle net GND: 102.667,74.727 110.312,76.175
  rectangle net GND: 93.853,79.07 99.085,81.051
  rectangle net GND: 93.853,81.051 105.054,81.712
  rectangle net GND: 112.852,84.023 122.936,85.7
  rectangle net GND: 111.252,77.826 112.852,81.559
  rectangle net GND: 93.853,81.534 112.852,85.7
  rectangle net GND: 101.625,74.727 102.667,77.978
  rectangle net GND: 101.625,77.978 108.661,78.842
  rectangle net GND: 121.564,73.533 122.936,84.607
  rectangle net GND: 109.88,60.782 118.491,61.493
  rectangle net GND: 111.684,61.265 112.243,64.389
  rectangle net GND: 109.88,61.265 111.684,64.389
  rectangle net GND: 118.415,60.782 122.936,73.889
  rectangle net GND: 111.989,76.2 118.11,78.537
  rectangle net MP2122_SW1: 107.112,64.541 111.354,65.456
  rectangle net MP2122_SW1: 111.176,64.541 111.582,66.7
  rectangle net V5: 114.529,73.152 116.23,73.863
  rectangle net V5: 112.878,72.695 113.513,72.873
  rectangle net V5: 112.878,72.873 114.681,73.05
  rectangle net V5: 114.071,73 114.681,73.254
  rectangle net MP2122_SW2: 107.112,69.494 111.582,71.196
  rectangle net MP2122_SW2: 107.112,70.053 110.566,73.635
  rectangle net MP2122_SW2: 111.176,68.224 111.582,71.196
  rectangle net AMS1117_OUT: 99.314,78.511 101.448,79.553
  rectangle net AMS1117_OUT: 92.532,76.962 93.65,79.883
  rectangle net AMS1117_OUT: 105.207,78.994 110.973,81.331
  rectangle net AMS1117_OUT: 99.314,78.994 105.689,80.874
  rectangle net AMS1117_OUT: 92.558,76.606 101.448,78.892
  rectangle net V10: 81.686,69.748 85.547,72.288
  rectangle net V10: 87.503,72.873 97.434,74.574
  rectangle net V10: 85.039,70.764 89.103,72.288
  rectangle net V10: 87.503,72.288 89.103,73.66
  rectangle net V10: 96.977,72.873 103.708,74.549
  rectangle net V33A: 81.737,63.119 85.573,66.065
  rectangle net V33A: 84.785,64.186 97.46,66.065
  rectangle net V33A: 97.13,64.186 103.708,65.989
  rectangle net Net...1_2: 113.03,80.315 120.701,83.795
  rectangle net Net...1_1: 119.228,74.168 121.158,78.943
  rectangle net V5: 115.9,61.976 118.161,75.997
  rectangle net V5: 111.836,64.592 112.243,65.761
  rectangle net V5: 111.836,64.541 113.411,65.075
  rectangle net V5: 112.446,61.697 113.411,64.618
  rectangle net V5: 113.309,61.697 118.161,63.348
  rectangle net V5: 102.845,76.327 111.811,77.673
  rectangle net V5: 110.515,74.625 116.154,75.997
  rectangle net V5: 110.515,74.651 111.811,77.546
  region net GND_M: 114.68,9.296 119.355,13.971 119.355,9.346 119.355,9.296 119.305,9.296
  region net GND_M: 119.31,12.725 119.31,9.325 11.376,9.325 6.706,13.995 6.706,26.772 3.302,26.772 3.302,0.45 122.682,0.45 122.682,12.725
Bottom Layer:
  rectangle net GND: 59.03,48.997 67.132,56.413
  rectangle net GND: 119.278,32.588 122.682,33.401
  rectangle net GND: 3.302,32.487 6.706,34.011
  rectangle net GND_M: 119.278,4.877 122.682,27.356
  rectangle net GND_M: 3.302,0.45 122.682,9.325
  rectangle net GND_M: 76.995,9.15 77.63,17.81
  rectangle net GND_M: 76.36,8.275 76.995,17.81
  rectangle net GND_M: 62.416,9.05 63.025,17.81
  rectangle net GND_M: 63.025,8.925 63.66,17.81
  rectangle net GND_M: 49.055,9.225 49.64,17.81
  rectangle net GND_M: 48.522,9.2 49.055,17.81
  rectangle net GND_M: 3.302,9.325 6.731,28.473
  region net GND_M: 114.68,9.296 119.355,13.971 119.355,9.346 119.355,9.296 119.305,9.296
  region net GND_M: 6.705,13.996 11.38,9.321 6.755,9.321 6.705,9.321 6.705,9.371

## Silkscreen, mask and mechanical layers (free items; w line width, h text height)
Top Overlay:
  lines w0.152: 7.01,47.955 13.437,47.955 ; 8.661,45.771 8.661,51.816 ; 10.287,45.745 10.287,51.829 ; 11.862,45.745 11.862,51.841 ; 7.01,45.72 7.01,51.841 13.437,51.841 13.437,45.72 7.01,45.72
  text "RTS" at 2.261,66.751 h0.76 r270
  text "DTR" at 2.261,64.205 h0.76 r270
  text "RXD" at 2.261,61.658 h0.76 r270
  text "+" at 10.262,60.782 h1.52
  text "TXD" at 2.261,59.112 h0.76 r270
  text "GND" at 2.261,56.566 h0.76 r270
  text "V33" at 2.184,53.289 h0.76 r270
  text "BEEP" at 7.468,51.359 h0.76 r270
  text "RST" at 9.076,51.359 h0.76 r270
  text "MDC" at 10.685,51.359 h0.76 r270
  text "MDIO" at 12.294,51.359 h0.76 r270
  text "GND" at 2.184,50.724 h0.76 r270
  text "Switch Demo V2.0  2018.01" at 124.849,50.394 h2.03 r90
  text "D4" at 2.184,47.828 h0.76 r270
  text "D6" at 7.468,47.422 h0.76 r270
  text "D7" at 9.076,47.422 h0.76 r270
  text "D2" at 10.685,47.422 h0.76 r270
  text "D1" at 12.294,47.422 h0.76 r270
  text "D5" at 2.184,45.288 h0.76 r270
  text "@libc0607" at 124.866,38.329 h2.03 r90
  text "JLCJLCJLCJLC" at 11.133,3.302 h0.76